# Altium PCB PCB.PcbDoc
Units mm, origin at the board's own origin, x right, y up, seen from the top; angles counter-clockwise.
Board outline 53.5 x 53 mm, 2 copper layers (Top Layer, Bottom Layer), stack 1.271 mm thick; 55 components, 41 nets, 214 pads, 205 vias.
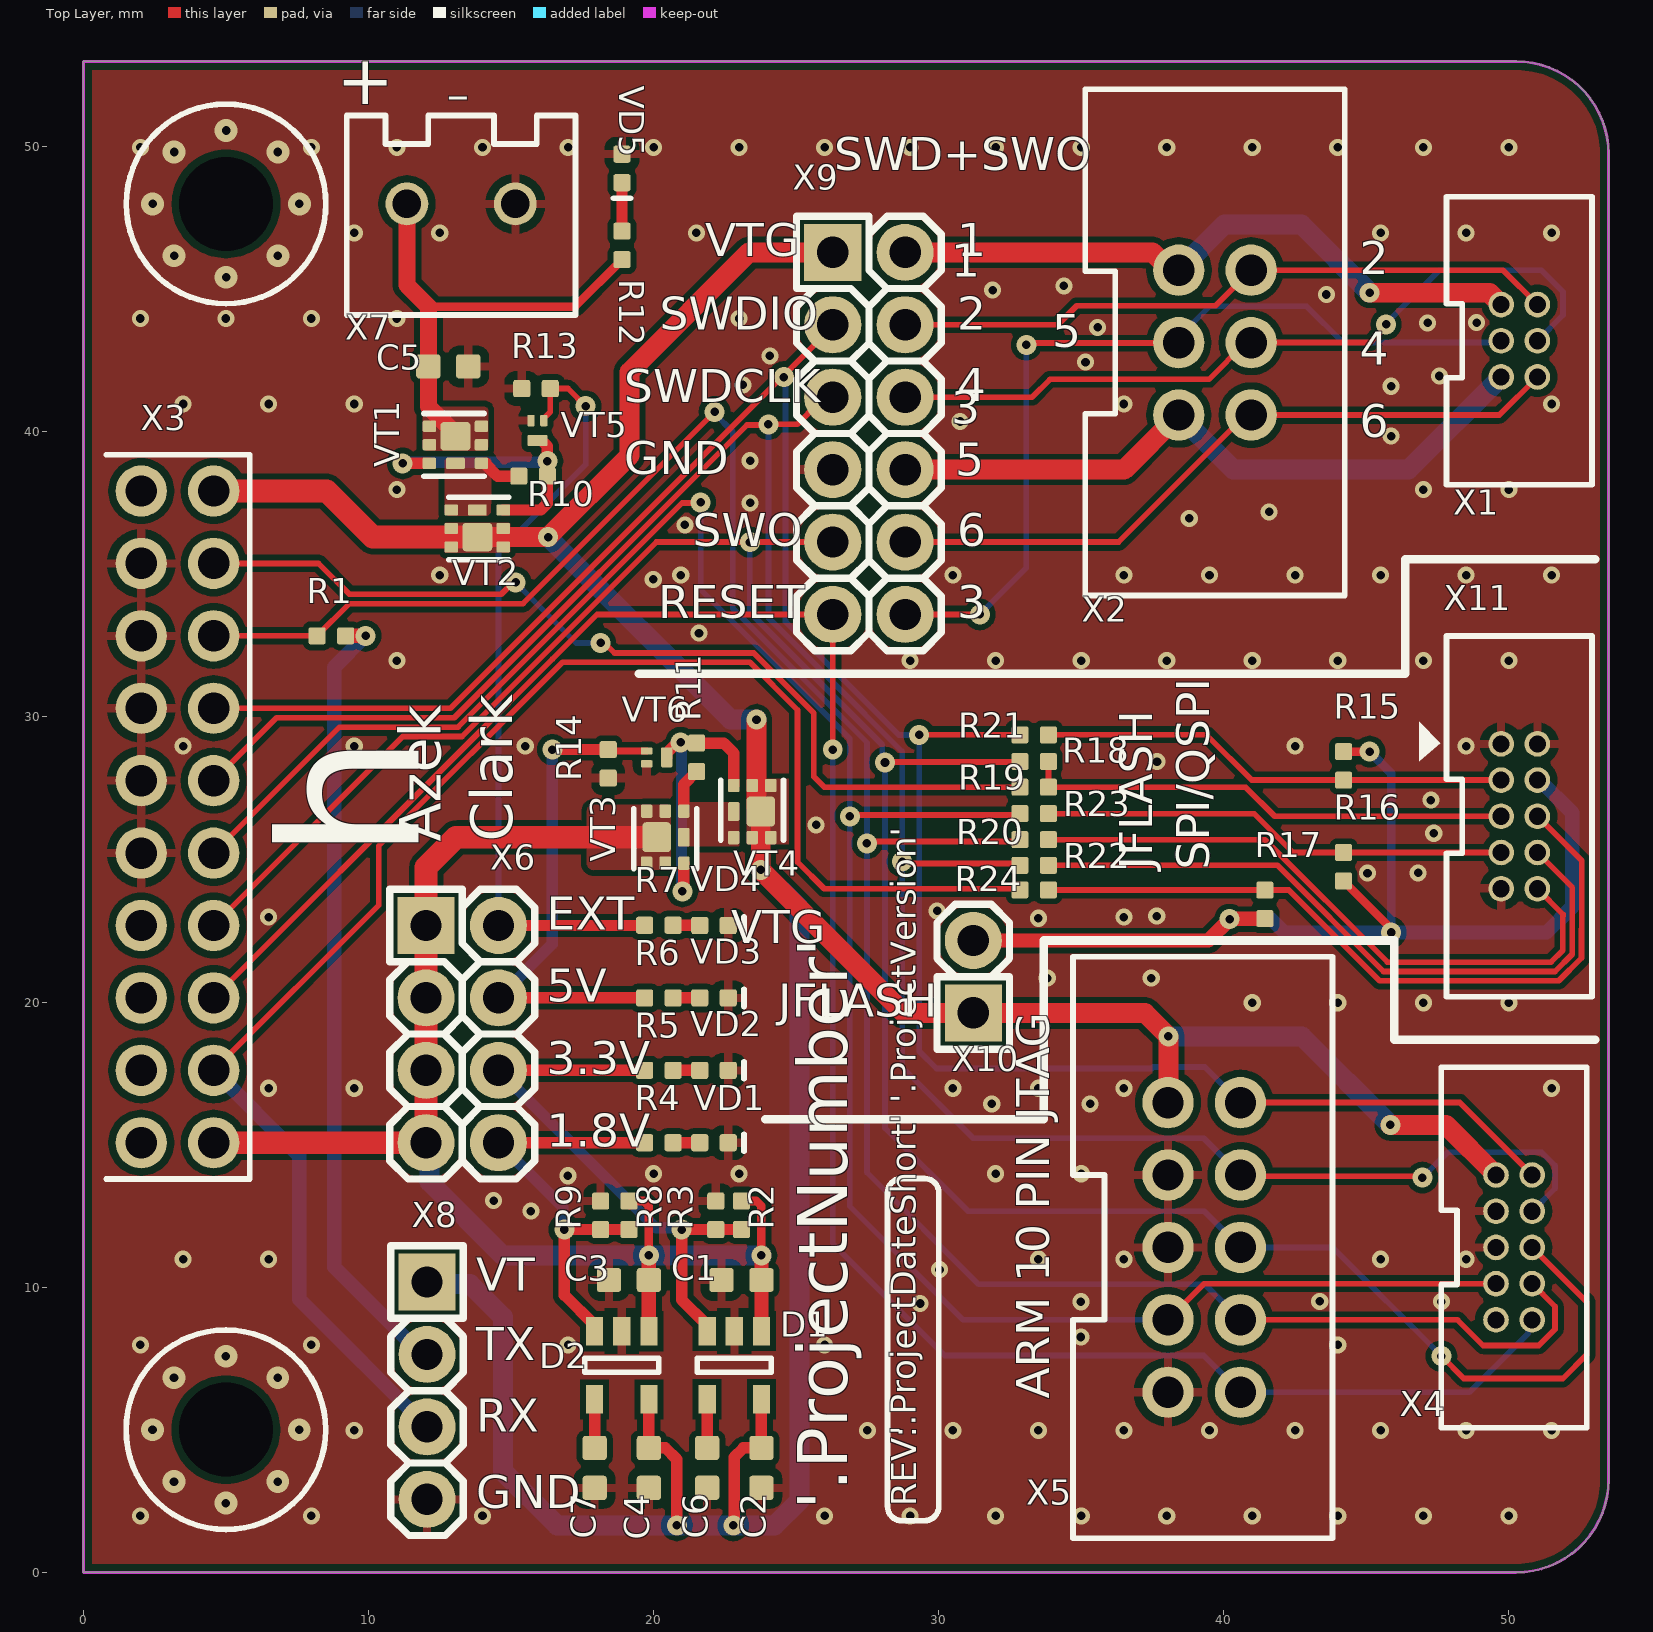
[diagram p0: Top Layer view]
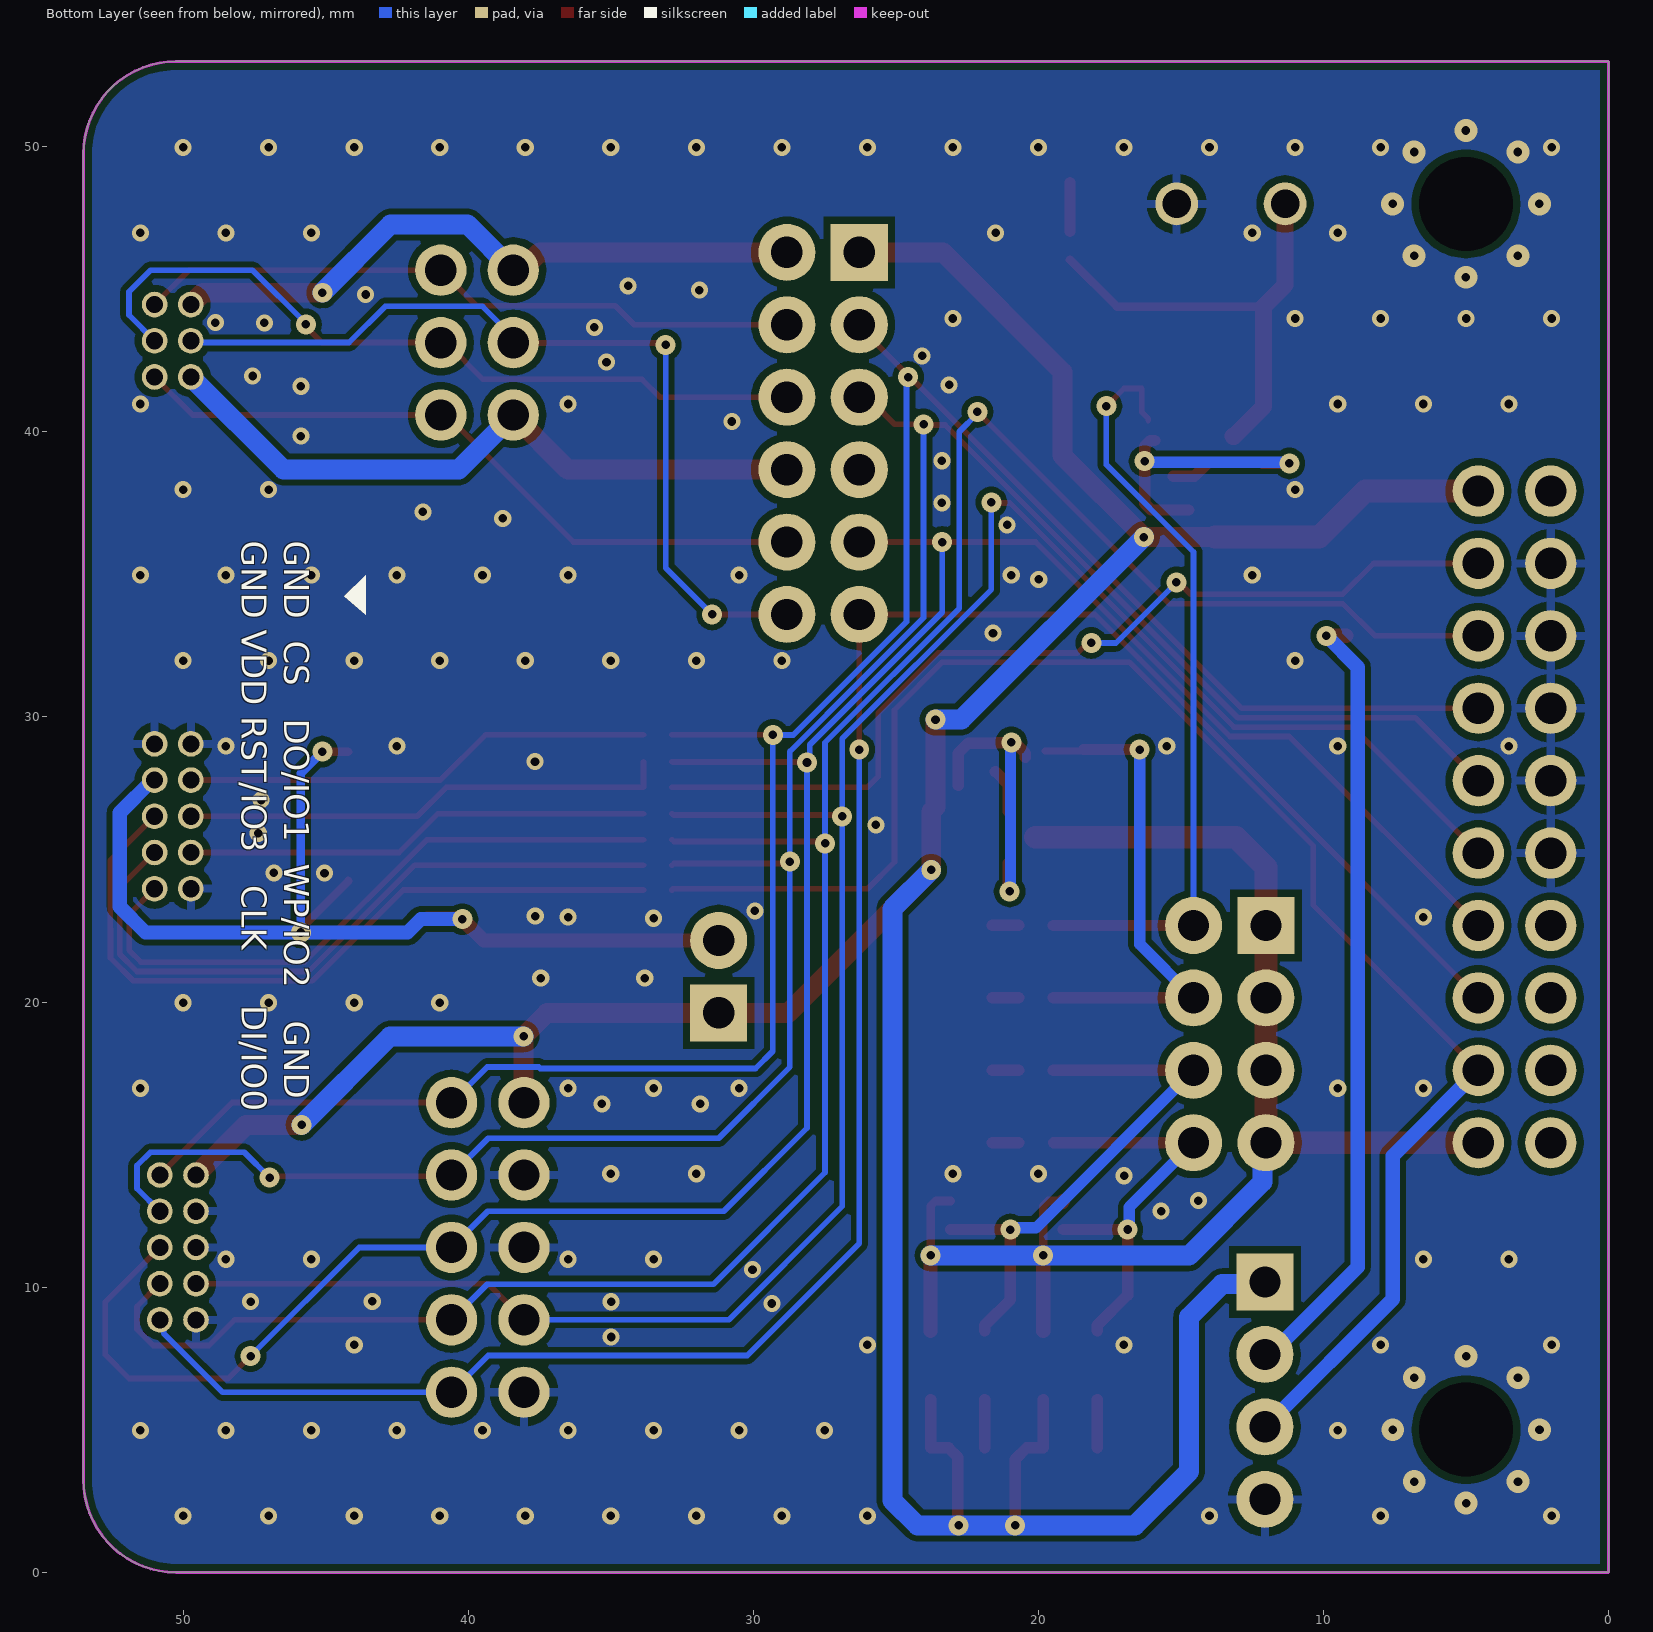
[diagram p1: Bottom Layer view, seen from below]
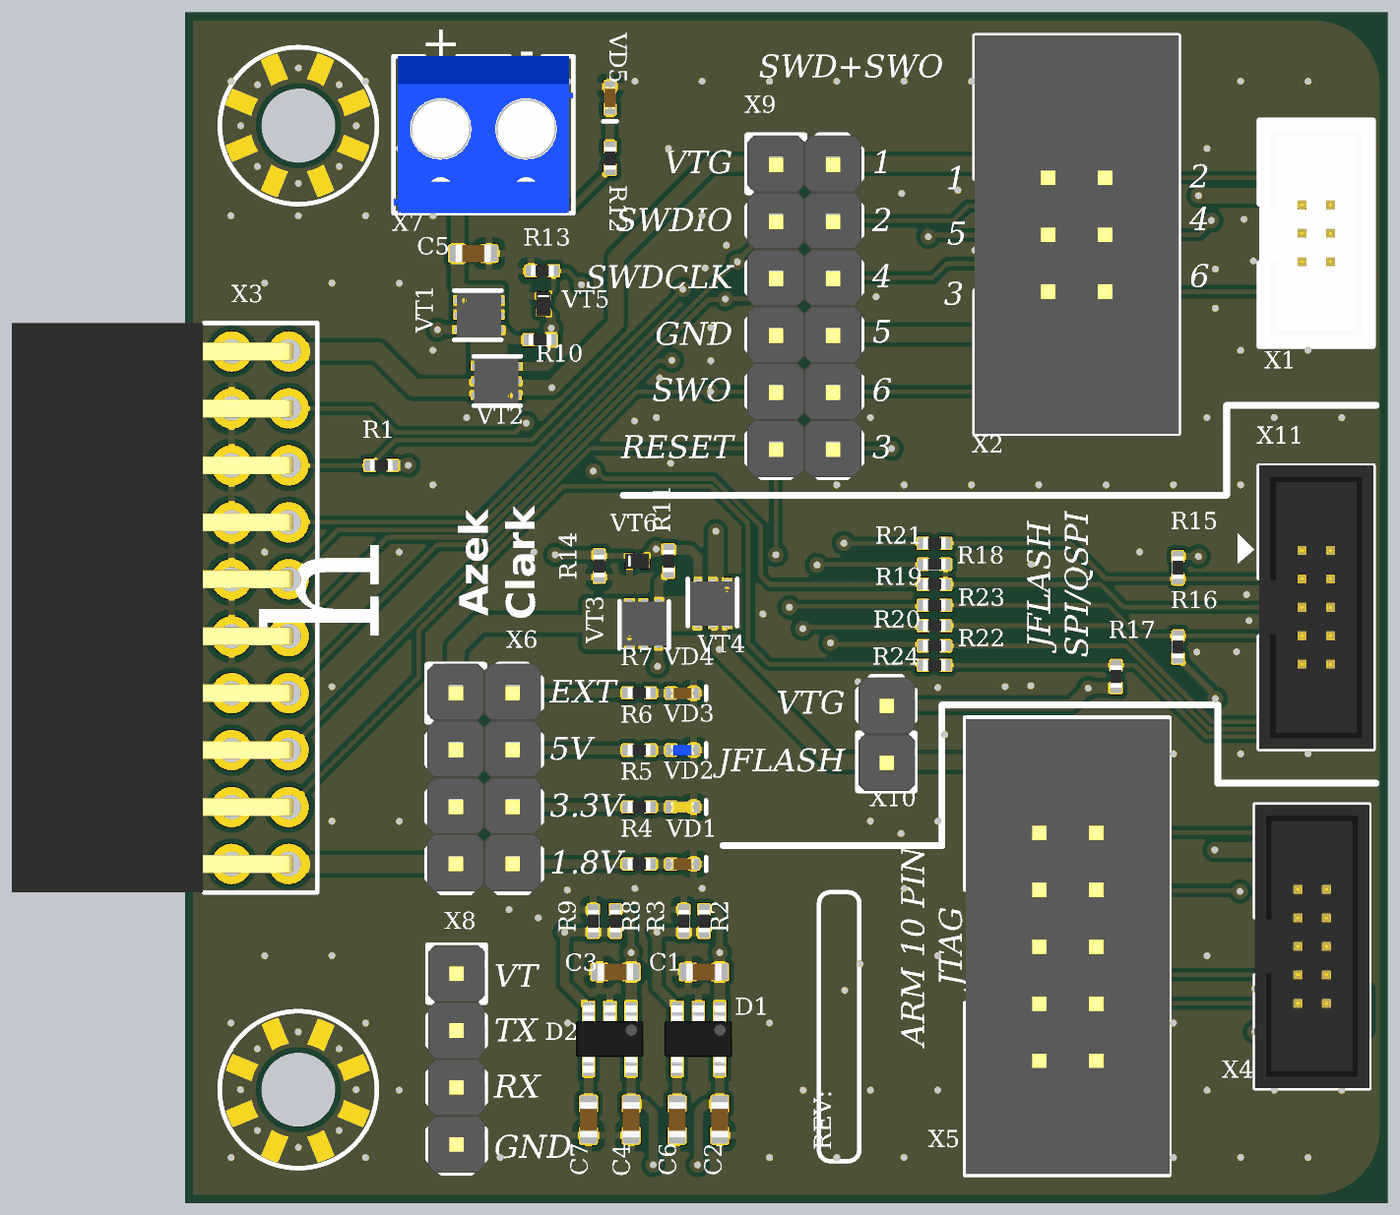
[diagram p2: 3D render of the assembled board from above, using the file's embedded part models]

## Layer stack, top to bottom
Top Solder: solder mask 0.0102, Solder Resist, Dk 3.5
Top Layer: signal copper 0.0356
Dielectric 1: dielectric 1.2, FR-4, Dk 4.8
Bottom Layer: signal copper 0.0356
Bottom Solder: solder mask 0.0102, Solder Resist, Dk 3.5

## Board outline
0,-0.005 0,52.995 50.25,52.995 cw(c50.25,49.745) 53.5,49.745 53.5,3.245 cw(c50.25,3.245) 50.25,-0.005

## Design rules (kind name [scope] priority, off if disabled: settings)
AcuteAngle [All] p1: minimum=4.50000000000000E+0001 checktracksonly=TRUE
BoardOutlineClearance [All] p1: gap=0.3 ignorepadtopadclearanceinfootprint=FALSE
Clearance Clearance_NPTH [All vs InPadClass('NPTH')] p1: gap=0.4 ignorepadtopadclearanceinfootprint=FALSE except(0: Arc-Hole Track-Hole SMDPad-Hole THPad-Hole Via-Hole Fill-Hole Poly-Hole Region-Hole Text-Hole)
Clearance Clearance_MultiLayerPad [OnLayer('Multi-Layer') and IsPad] p2: gap=0.25 ignorepadtopadclearanceinfootprint=FALSE except(0: Arc-Hole Track-Hole SMDPad-Hole THPad-Hole Via-Hole Fill-Hole Poly-Hole Region-Hole Text-Hole)
Clearance Clearance_Polygon [InPolygon] p3: gap=0.2 ignorepadtopadclearanceinfootprint=FALSE except(0: Arc-Hole Track-Hole SMDPad-Hole THPad-Hole Via-Hole Fill-Hole Poly-Hole Region-Hole Text-Hole)
Clearance [All] p4: gap=0.15 ignorepadtopadclearanceinfootprint=FALSE except(0: Arc-Hole Track-Hole SMDPad-Hole THPad-Hole Via-Hole Fill-Hole Poly-Hole Region-Hole Text-Hole; 0.127: Arc-Arc Arc-Track Track-Track)
ComponentClearance [All] p1: gap=0.2 collisioncheckmode=3 verticalgap=0.2 showdistances=FALSE
DiffPairsRouting [All] p1: maxlimit=0.254 minlimit=0.2 mostfreqgap=0.254 toplayer_minwidth=0.2 toplayer_maxwidth=0.5 toplayer_prefwidth=0.3 bottomlayer_minwidth=0.2 bottomlayer_maxwidth=0.5 bottomlayer_prefwidth=0.3 maxuncoupledlength=12.7
Height [All] p1: minheight=0 maxheight=60 prefheight=12.7
HoleSize [All] p1: absolutevalues=TRUE maxlimit=6.3 minlimit=0.3 maxpercent=80.000 minpercent=20.000
HoleToHoleClearance [All] p1: gap=0.2 allowstackedmicrovias=TRUE
MinimumAnnularRing [All] p1: minimumring=0.13
MinimumSolderMaskSliver [All] p1: minsoldermaskwidth=0.05
PasteMaskExpansion [All] p1: expansion=-0.05
PlaneClearance [All] p1: clearance=0.5
PlaneConnect [All] p1: planeconnectstyle=Relief reliefexpansion=0.5 reliefentries=4 reliefconductorwidth=0.3 reliefairgap=0.2
PolygonConnect PolygonConnect_Via [IsVia] p1: connectstyle=Direct reliefconductorwidth=0.254 reliefentries=4 polygonreliefangle="90 Angle" airgapwidth=0.254
PolygonConnect [All] p2: connectstyle=Relief reliefconductorwidth=0.3 reliefentries=4 polygonreliefangle="90 Angle" airgapwidth=0.3
RoomDefinition J-Flash [InComponentClass('J-Flash')] p1: confinementstyle=ConfineIn formatcopy=TRUE lockcomponents=FALSE outline 29.617,18.021 29.617,23.755 32.3,23.755 32.3,29.921 47.515,29.921 47.515,33.14 53.215,33.14 53.215,19.89 32.811,19.89 32.811,18.021
RoomDefinition VDD-SWITCH [InComponentClass('VDD-SWITCH')] p2: confinementstyle=ConfineIn formatcopy=TRUE lockcomponents=FALSE outline 23.524,23.339 23.524,14.411 16.211,14.411 16.211,13.414 10.369,13.414 10.369,24.336 16.211,24.336 16.211,23.339
RoomDefinition VDD-EXT-SWITCH [InComponentClass('VDD-EXT-SWITCH')] p3: confinementstyle=ConfineIn formatcopy=TRUE lockcomponents=FALSE outline 14.772,42.124 16.98,42.124 16.98,40.916 16.879,40.916 16.879,37.841 15.272,37.841 15.272,35.156 12.366,35.156 12.366,38.091 11.714,38.091 11.714,40.999 14.772,40.999
RoomDefinition VDD-EXT-CONNECTOR [InComponentClass('VDD-EXT-CONNECTOR')] p4: confinementstyle=ConfineIn formatcopy=TRUE lockcomponents=FALSE outline 8.94,43.795 8.94,51.395 17.56,51.395 17.56,50.289 19.493,50.289 19.493,47.889 19.443,47.889 19.443,45.489 17.56,45.489 17.56,43.795 14.175,43.795 14.175,41.62 11.425,41.62 11.425,43.795
RoomDefinition VDD-5V-SWITCH [InComponentClass('VDD-5V-SWITCH')] p5: confinementstyle=ConfineIn formatcopy=TRUE lockcomponents=FALSE outline 17.374,24.325 25.225,24.325 25.225,29.7 17.374,29.7
RoomDefinition LDO-3V3 [InComponentClass('LDO-3V3')] p6: confinementstyle=ConfineIn formatcopy=TRUE lockcomponents=FALSE outline 21.578,13.625 22.786,13.625 23.686,13.625 23.686,10.98 24.511,10.98 24.511,9.365 24.636,9.365 24.636,5.157 24.511,5.157 24.511,2.231 23.053,2.231 23.053,2.232 21.153,2.232 21.153,5.157 21.028,5.157 21.028,9.365 21.578,9.365
RoomDefinition LDO-1V8 [InComponentClass('LDO-1V8')] p7: confinementstyle=ConfineIn formatcopy=TRUE lockcomponents=FALSE outline 17.541,13.625 18.749,13.625 19.739,13.625 19.739,10.979 20.564,10.979 20.564,9.364 20.689,9.364 20.689,5.156 20.564,5.156 20.564,2.231 18.664,2.231 17.206,2.231 17.206,5.156 17.08,5.156 17.08,9.364 17.541,9.364
RoomDefinition JLINK-CONNECTOR [InComponentClass('JLINK-CONNECTOR')] p8: confinementstyle=ConfineIn formatcopy=TRUE lockcomponents=FALSE outline -8.064,13.441 -8.064,39.549 6.194,39.549 6.194,33.449 9.804,33.449 9.804,32.241 6.194,32.241 6.194,13.441
RoutingVias [All] p1: holewidth=0.3 width=0.7 viastyle="Through Hole" minholewidth=0.3 minwidth=0.6 maxholewidth=0.5 maxwidth=1.2
SilkToSilkClearance [All] p1: silktosilkclearance=0
SilkToSolderMaskClearance [IsPad] p1: minsilkscreentomaskgap=0.05 clearancetoexposedcopper=TRUE
SolderMaskExpansion SolderMaskExpansion_VIa [isVia] p1: expansion=0.102 istentingtop=TRUE
SolderMaskExpansion [All] p2: expansion=0.05 istentingtop=FALSE
UnRoutedNet [All] p1: checkbadconnections=TRUE
Width [All] p1: maxlimit=10 minlimit=0.127 preferedwidth=0.2
18 further rules are at their usual default settings.

## Classes and differential pairs
component class J-Flash: R15 R16 R17 R18 R19 R20 R21 R22 R23 R24 X10 X11
component class VDD-SWITCH: R4 R5 R6 R7 VD1 VD2 VD3 VD4 X6
component class VDD-EXT-SWITCH: R10 R13 VT1 VT2 VT5
component class VDD-EXT-CONNECTOR: C5 R12 VD5 X7
component class VDD-5V-SWITCH: R11 R14 VT3 VT4 VT6
component class LDO-3V3: C1 C2 C6 D1 R2 R3
component class LDO-1V8: C3 C4 C7 D2 R8 R9
component class JLINK-CONNECTOR: R1 X3

## Components (designator, comment, footprint, x,y, rotation, side; value= is the part's Value field where it differs from the comment)
C1 "1µF" CH0603CM 23.082,10.251 r0 top
C2 "1µF" CH0603CM 23.782,3.66 r90 top
C3 "1µF" CH0603CM 19.135,10.25 r0 top
C4 "1µF" CH0603CM 19.835,3.66 r90 top
C5 "1µF" CH0603CM 12.8,42.295 r180 top
C6 "10nF" CH0603CM 21.882,3.661 r90 top
C7 "10nF" CH0603CM 17.935,3.66 r90 top
D1 "LP2985-33DBVR" SOT23-5 22.832,7.261 r270 top
D2 "LP2985-18DBVR" SOT23-5 18.885,7.26 r270 top
R1 "0" CH0402R 8.7,32.845 r0 top
R2 "10k" CH0402R 23.082,12.521 r90 top
R3 "10k" CH0402R 22.182,12.521 r270 top
R4 "270" CH0402R 20.188,15.065 r180 top
R5 "270" CH0402R 20.188,17.605 r180 top
R6 "270" CH0402R 20.188,20.145 r180 top
R7 "270" CH0402R 20.188,22.694 r180 top
R8 "10k" CH0402R 19.135,12.521 r90 top
R9 "10k" CH0402R 18.145,12.521 r270 top
R10 "10k" CH0402R 15.775,38.445 r180 top
R11 "10k" CH0402R 21.51,28.582 r270 top
R12 "1k" CH0402R 18.893,46.539 r270 top
R13 "10k" CH0402R 15.876,41.52 r0 top
R14 "10k" CH0402R 18.41,28.357 r90 top
R15 "10k" CH0402R 44.203,28.282 r90 top
R16 "10k" CH0402R 44.203,24.745 r270 top
R17 "10k" CH0402R 41.442,23.428 r270 top
R18 "0" CH0402R 33.35,28.434 r0 top
R19 "0" CH0402R 33.35,27.537 r0 top
R20 "0" CH0402R 33.35,25.695 r0 top
R21 "0" CH0402R 33.35,29.371 r0 top
R22 "0" CH0402R 33.35,24.795 r0 top
R23 "0" CH0402R 33.35,26.609 r0 top
R24 "0" CH0402R 33.35,23.932 r0 top
VD1 "RED" CH0402LR 22.12,15.065 r180 top
VD2 "GREEN" CH0402LG 22.12,17.605 r180 top
VD3 "BLUE" CH0402LB 22.12,20.145 r180 top
VD4 "RED" CH0402LR 22.12,22.685 r180 top
VD5 "RED" CH0402LR 18.893,49.239 r90 top
VT1 "FDMA291P" "MicroFET 2x2" 13.05,39.545 r270 top
VT2 "FDMA291P" "MicroFET 2x2" 13.818,36.61 r90 top
VT3 "FDMA291P" "MicroFET 2x2" 20.41,25.782 r0 top
VT4 "FDMA291P" "MicroFET 2x2" 23.46,26.682 r180 top
VT5 "*" DFN1006-3L 15.925,40.045 r270 top
VT6 "*" DFN1006-3L 20.11,28.582 r0 top
X1 "IDC1.27-6" "CON: IDC1.27-6" 50.365,43.195 r90 top
X2 "IDC-6" "CON: IDC-6MS" 39.691,43.131 r90 top
X3 "PBD-20R" "CON: PBD-20R" 3.3,26.495 r90 top
X4 "IDC1.27-10" "CON: IDC1.27-10" 50.183,11.393 r90 top
X5 "IDC-10" "CON: IDC-10MS" 39.315,11.393 r90 top
X6 "PLD-8" "CON: PLD-8" 13.29,18.875 r270 top
X7 "340-3.81-02P" "CON: 340-3.81-02P" 13.25,47.595 r0 top
X8 "PLS-4" "CON: PLS-4" 12.055,6.368 r270 top
X9 "PLD-12" "CON: PLD-12" 27.555,39.945 r270 top
X10 "PLS-2" "CON: PLS-2" 31.214,20.888 r90 top
X11 "IDC1.27-10" "CON: IDC1.27-10" 50.365,26.515 r90 top

## Footprints (in the part's own frame and the unit in brackets; to place one, negate y for a bottom-side part, rotate by r counter-clockwise, add the part's x,y. Pads: shape width x height; smd on the part's side, far side on the other; paste and mask are expansions set on the pad)
CH0402LB [mm]
  rrect25% 0.6x0.6 smd: 1(0.5,0) 2(-0.5,0)
  silkscreen extent -1.05,-0.3 -1.05,0.3, body extent -0.5,-0.25 0.51,0.25, height 0.4
CH0402LG [mm]
  rrect25% 0.6x0.6 smd: 1(0.5,0) 2(-0.5,0)
  silkscreen extent -1.05,-0.3 -1.05,0.3, body extent -0.5,-0.25 0.5,0.25, height 0.4
CH0402LR [mm]
  rrect25% 0.6x0.6 smd: 1(0.5,0) 2(-0.5,0)
  silkscreen extent -1.05,-0.3 -1.05,0.3, body extent -0.51,-0.25 0.5,0.25, height 0.4
CH0402R [mm]
  rrect25% 0.6x0.6 smd: 1(-0.5,0) 2(0.5,0)
  body extent -0.5,-0.25 0.5,0.26, height 0.33
CH0603CM [mm] "Chip Capacitor, 2-Leads, Body 1,53x0,85mm, IPC Medium Density"
  rrect25% 0.85x0.85 smd: 1(-0.7,0) 2(0.7,0)
  body extent -0.8,-0.4 0.8,0.4, height 0.6
"CON: 340-3.81-02P" [mm] "2 pin 3.81mm screw connector"
  round 1.5 hole 1: 1(-1.901,0.4) 2(1.901,0.4)
  silkscreen extent -4.01,-3.5 4.01,3.5, body extent -4.01,-3.5 4.01,3.5, height 8.4
"CON: IDC1.27-6" [mm] "IDC1.27-6, 1.27mm pitch, 6 pin PCB-mount connector"
  round 0.9 hole 0.6: 1(1.27,0.635) 2(1.27,-0.635) 3(0,0.635) 4(0,-0.635) 5(-1.27,0.635) 6(-1.27,-0.635)
  silkscreen extent -5.05,-2.55 5.05,2.55, body extent -5.05,-2.55 5.05,2.55, height 5.4
"CON: IDC1.27-10" [mm] "IDC1.27-10, 1.27mm pitch, 10 pin PCB-mount connector"
  round 0.9 hole 0.6: 1(2.54,0.635) 2(2.54,-0.635) 3(1.27,0.635) 4(1.27,-0.635) 5(0,0.635) 6(0,-0.635) 7(-1.27,0.635) 8(-1.27,-0.635) 9(-2.54,0.635) 10(-2.54,-0.635)
  silkscreen extent -6.32,-2.55 6.32,2.55, body extent -6.32,-2.55 6.32,2.55, height 5.4
"CON: IDC-6MS" [mm] "IDC-6MS 6 pin PCB-mount connector"
  round 1.8 hole 1.1: 1(2.54,1.27) 2(2.54,-1.27) 3(0,1.27) 4(0,-1.27) 5(-2.54,1.27) 6(-2.54,-1.27)
  silkscreen extent -8.87,-4.55 8.89,4.55, body extent -8.87,-4.55 8.89,4.55, height 9
"CON: IDC-10MS" [mm] "IDC-10MS 10 pin PCB-mount header"
  round 1.8 hole 1.1: 1(5.08,1.27) 2(5.08,-1.27) 3(2.54,1.27) 4(2.54,-1.27) 5(0,1.27) 6(0,-1.27) 7(-2.54,1.27) 8(-2.54,-1.27) 9(-5.08,1.27) 10(-5.08,-1.27)
  silkscreen extent -10.2,-4.5 10.2,4.6, body extent -10.16,-4.53 10.14,4.57, height 9
"CON: PBD-20R" [mm] "PBD-20R"
  round 1.8 hole 1.1: 1(11.43,-1.27) 2(11.43,1.27) 3(8.89,-1.27) 4(8.89,1.27) 5(6.35,-1.27) 6(6.35,1.27) 7(3.81,-1.27) 8(3.81,1.27) 9(1.27,-1.27) 10(1.27,1.27) 11(-1.27,-1.27) 12(-1.27,1.27) 13(-3.81,-1.27) 14(-3.81,1.27) 15(-6.35,-1.27) 16(-6.35,1.27) 17(-8.89,-1.27) 18(-8.89,1.27) 19(-11.43,-1.27) 20(-11.43,1.27)
  silkscreen extent -12.7,-2.54 12.7,2.49, body extent -12.7,-1.45 12.7,11.06, height 5
"CON: PLD-8" [mm] "PLD-40 8 pin header"
  rect 2x2 hole 1.1: 1(-3.81,-1.27)
  round 2 hole 1.1: 2(-3.81,1.27) 3(-1.27,-1.27) 4(-1.27,1.27) 5(1.27,-1.27) 6(1.27,1.27) 7(3.81,-1.27) 8(3.81,1.27)
  silkscreen extent -5.08,-2.54 5.08,2.54, body extent -5.13,-2.55 5.03,2.53, height 8.54
"CON: PLD-12" [mm]
  rect 2x2 hole 1.1: 1(-6.35,-1.27)
  round 2 hole 1.1: 2(-6.35,1.27) 3(-3.81,-1.27) 4(-3.81,1.27) 5(-1.27,-1.27) 6(-1.27,1.27) 7(1.27,-1.27) 8(1.27,1.27) 9(3.81,-1.27) 10(3.81,1.27) 11(6.35,-1.27) 12(6.35,1.27)
  silkscreen extent -7.62,-2.54 7.62,2.54, body extent -7.62,-2.54 7.62,2.54, height 8.54
"CON: PLS-2" [mm]
  rect 2x2 hole 1.1: 1(-1.27,0)
  round 2 hole 1.1: 2(1.27,0)
  silkscreen extent -2.54,-1.27 2.54,1.27, body extent -2.57,-1.28 2.51,1.26, height 8.54
"CON: PLS-4" [mm] "PLS-40 4 pin header"
  rect 2x2 hole 1.1: 1(-3.81,0)
  round 2 hole 1.1: 2(-1.27,0) 3(1.27,0) 4(3.81,0)
  silkscreen extent -5.08,-1.27 5.08,1.27, body extent -5.08,-1.27 5.08,1.27, height 8.54
DFN1006-3L [mm] "3-Leads, Body 1.0x0.6mm (max), Pitch 0,35mm"
  rrect25% 0.4x0.25 smd: 1(-0.35,0.225) 3(-0.35,-0.225)
  rrect25% 0.4x0.7 smd: 2(0.35,0)
  body extent -0.54,-0.34 0.54,0.34, height 0.54
"MicroFET 2x2" [mm] "MicroFET, 2.0x2.0x0.8 mm"
  rrect25% 0.4x0.47 smd: 1(-0.65,0.913) 1(-0.65,-0.913) 1(0,0.913) 1(0,-0.913) 2(0.65,0.913) 3(0.65,-0.913)
  rrect25% 1x1.05 smd: 1(-0.3,0)
  rrect25% 0.4x0.66 smd: 2(0.65,0)
  silkscreen extent -1.1,-1.1 1.1,1, body extent -1,-1 1,1, height 0.8
SOT23-5 [mm] "SOT23, 5-Leads, Body 2,90x2,80mm, Pitch 0,95mm, IPC Medium Density"
  rect 1x0.6 smd: 1(-1.2,0.95) 2(-1.2,0) 3(-1.2,-0.95) 4(1.2,-0.95) 5(1.2,0.95)
  round 0.5 on Mech1: ""(-1.1,1.1)
  silkscreen extent -0.25,-1.3 0.25,1.3, body extent -1.5,-1.5 1.5,1.5, height 1.3

## Part data
C1 C2 C3 C4 C5 C6 C7: library part Capacitor
  C1 C2 C6: ClassName=LDO-3V3
  C3 C4 C7: ClassName=LDO-1V8
  C5: ClassName=VDD-EXT-CONNECTOR
D1: "LDO", Manufacturer="Texas Instruments", ClassName=LDO-3V3, ComponentKind=SOT-23-5, HelpURL=https://www.digikey.com/product-detail/en/texas-instruments/LP2985-33DBVR/296-18476-1-ND/809911, Model=LP2985-33DBVR
D2: library part LP2985-33DBVR, "LDO", Manufacturer="Texas Instruments", ClassName=LDO-1V8, ComponentKind=SOT-23-5, HelpURL=https://www.digikey.com/product-detail/en/texas-instruments/LP2985-33DBVR/296-18476-1-ND/809911, Model=LP2985-18DBVR
R1 R2 R3 R4 R5 R6 R7 R8 R9 R10 R11 R12 R13 R14 R15 R16 R17 R18 R19 R20 R21 R22 R23 R24: library part Resistor
  R1: ClassName=JLINK-CONNECTOR
  R2 R3: ClassName=LDO-3V3
  R4 R5 R6 R7: ClassName=VDD-SWITCH
  R8 R9: ClassName=LDO-1V8
  R10 R13: ClassName=VDD-EXT-SWITCH
  R11 R14: ClassName=VDD-5V-SWITCH
  R12: ClassName=VDD-EXT-CONNECTOR
  R15 R16 R17 R18 R19 R20 R21 R22 R23 R24: ClassName=J-FLASH
VD1 VD2 VD3 VD4 VD5: library part LED
  VD1 VD2 VD3 VD4: ClassName=VDD-SWITCH
  VD5: ClassName=VDD-EXT-CONNECTOR
VT1 VT2 VT3 VT4: library part P-chanel, "Mosfet", Model=FDMA291P
  VT1 VT2: ClassName=VDD-EXT-SWITCH
  VT3 VT4: ClassName=VDD-5V-SWITCH
VT5 VT6: library part N-chanel, "Mosfet"
  VT5: ClassName=VDD-EXT-SWITCH
  VT6: ClassName=VDD-5V-SWITCH
X1 X2: library part 6-Connector
  X1: Model=IDC1.27-6
  X2: Model=IDC-6
X3: library part 20-Connector, ClassName=JLINK-CONNECTOR, Model=PBD-20R
X4 X5 X11: library part 10-Connector
  X4: Model=IDC1.27-10
  X5: Model=IDC-10
  X11: ClassName=J-FLASH, Model=IDC1.27-10
X6: library part 8-Connector, ClassName=VDD-SWITCH, Model=PLD-8
X7 X10: library part 2-Connector
  X7: ClassName=VDD-EXT-CONNECTOR, Model=340-3.81-02P
  X10: ClassName=J-FLASH, Model=PLS-2
X8: library part 4-Connector, Model=PLS-4
X9: library part 12-Connector, Model=PLD-12

## Free pads (board coordinates)
  round 0 hole 3.3 unplated paste+0 mask+0.1: 0(5,5) 0(5.005,47.995)

## Via types
v1: diameter 0.6, hole 0.3, Top Layer to Bottom Layer, tented both sides, 149 vias
v2: diameter 0.7, hole 0.3, Top Layer to Bottom Layer, tented both sides, 40 vias
v3: diameter 0.8, hole 0.3, Top Layer to Bottom Layer, tented both sides, 16 vias

## Nets (pads, with @x,y where several pads share a name; then routed paths per layer and width w, separated by ;. In a path a pad name is that pad's centre, name@x,y a point inside that pad or via, vN(x,y) a via of type N, cw(c..) or ccw(c..) an arc to the next point about the centre after c; other vN are vias at no path point)
EXT-RESET: X1.3 X2.3 X9.12 | length 30.7
  Top Layer w0.2: X9.12 v2(31.442,33.595) ; v2(33.075,43.048) 33.14,43.113 38.404,43.113 X2.3
  Bottom Layer w0.2: v2(31.442,33.595) 33.075,35.228 v2(33.075,43.048) ; X2.3@38.227,43.131 39.497,44.401 42.912,44.401 44.182,43.131 49.665,43.131 X1.3
EXT-SWDCLK/TCLK: X1.4 X2.4 X9.6 | length 27.4
  Top Layer w0.2: X9.6 33.277,41.215 33.902,41.841 39.477,41.841 40.767,43.131 45.137,43.131 45.692,43.686 v2(45.692,43.767)
  Bottom Layer w0.2: v2(45.692,43.767) 45.692,43.799 47.564,45.671 51.145,45.671 51.9,44.915 51.9,44.095 X1.4
EXT-SWDIO/TMS: X1.2 X2.2 X9.4 | length 23.5
  Top Layer w0.2: X9.4 34.179,43.755 34.844,44.421 39.711,44.421 X2.2 49.795,45.671 X1.2
EXT-SWO/TDO: X1.6 X2.6 X9.10 | length 24.6
  Top Layer w0.2: X9.10 36.312,36.135 40.767,40.591 X2.6 49.665,40.591 X1.6
GND: C1.1 C2.1 C3.1 C4.1 C5.1 C6.1 C7.1 D1.2 D2.2 R3.1 R9.1 R13.1 R14.1 VD1.2 VD2.2 VD3.2 VD4.2 VD5.1 VT5.3 VT6.3 X3.4 X3.6 X3.8 X3.10 X3.12 X4.3 X4.5 X4.9 X5.3 X5.5 X5.9 X7.2 X8.4 X9.7 X11.1 X11.2 X11.9
  other v1: 2,1.977 8,1.977 14,1.977 26,1.977 29,1.977 32,1.977 35,1.977 38,1.977 41,1.977 44,1.977 47,1.977 50,1.977 9.5,4.977 27.5,4.977 30.5,4.977 33.5,4.977 36.5,4.977 39.5,4.977 42.5,4.977 45.5,4.977 48.5,4.977 51.5,4.977 2,7.977 8,7.977 17,7.977 26,7.977 44,7.977 34.992,8.252 29.35,9.426 34.992,9.49 43.368,9.5 47.633,9.493 30.03,10.617 3.5,10.977 6.5,10.977 33.5,10.977 36.5,10.977 45.5,10.977 48.5,10.977 15.696,12.665 14.392,13.033 16.992,13.907 20,13.977 23,13.977 32,13.977 35,13.977 31.86,16.429 35.31,16.428 6.5,16.977 9.5,16.977 30.5,16.977 33.5,16.977 36.5,16.977 51.5,16.977 41,19.977 44,19.977 47,19.977 50,19.977 33.809,20.84 37.459,20.84 33.5,22.937 6.5,22.977 36.5,22.977 37.65,23.017 29.944,23.198 45.042,24.524 46.816,24.532 47.367,25.92 25.703,26.215 47.266,27.082 37.659,28.432 3.5,28.977 9.5,28.977 15.5,28.977 42.5,28.977 48.5,28.977 11,31.977 29,31.977 32,31.977 35,31.977 38,31.977 41,31.977 44,31.977 47,31.977 50,31.977 21.594,32.941 19.988,34.823 12.5,34.977 20.954,34.977 30.5,34.977 36.5,34.977 39.5,34.977 42.5,34.977 45.5,34.977 48.5,34.977 51.5,34.977 21.101,36.739 38.789,36.966 41.59,37.195 23.385,37.508 11,37.977 47,37.977 50,37.977 23.385,38.987 45.873,39.849 30.75,40.363 3.5,40.977 6.5,40.977 9.5,40.977 36.5,40.977 51.5,40.977 45.873,41.599 23.136,41.648 47.564,41.96 35.15,42.445 24.079,42.662 35.577,43.663 47.15,43.819 48.869,43.83 2,43.977 5,43.977 8,43.977 11,43.977 23,43.977 43.6,44.817 31.892,44.971 34.39,45.118 9.5,46.977 12.5,46.977 21.5,46.977 45.5,46.977 48.5,46.977 51.5,46.977 2,49.977 8,49.977 11,49.977 14,49.977 17,49.977 20,49.977 23,49.977 26,49.977 29,49.977 32,49.977 35,49.977 38,49.977 41,49.977 44,49.977 47,49.977 50,49.977
  other v3: 5,2.425 3.179,3.179 6.821,3.179 2.425,5 7.575,5 3.179,6.821 6.821,6.821 5,7.575 5.005,45.42 3.184,46.174 6.826,46.174 2.43,47.995 7.58,47.995 3.184,49.816 6.826,49.816 5.005,50.57
GND-EXT: X1.5 X2.5 X9.8 | length 23.8
  Top Layer w0.7: X9.8 36.505,38.675 X2.5
  Bottom Layer w0.7: X2.5 40.333,38.678 46.483,38.678 X1.5
JLINK-RX: R24.1 X3.17 X8.3 | length 57.5
  Top Layer w0.2: X3.17 10.356,23.391 10.356,25.469 16.805,31.918 23.379,31.918 25.05,30.247 25.05,24.915 25.989,23.975 32.806,23.975 R24.1
  Bottom Layer w0.5: X3.17 7.575,14.6 7.575,9.578 X8.3
JLINK-TX: R1.2 X8.2 | length 27.8
  Top Layer w0.5: R1.2 v2(9.899,32.845)
  Bottom Layer w0.5: v2(9.899,32.845) 8.8,31.746 8.8,29.267 8.8,16.687 8.8,10.705 11.867,7.638 X8.2
NetC6_2: C6.2 D1.4 | length 1.7
  Top Layer w0.4: C6.2 D1.4
NetC7_2: C7.2 D2.4 | length 1.7
  Top Layer w0.4: C7.2 D2.4
NetR4_1: R4.1 VD1.1 | length 0.9
  Top Layer w0.4: R4.1 VD1.1
NetR5_1: R5.1 VD2.1 | length 0.9
  Top Layer w0.4: R5.1 VD2.1
NetR6_1: R6.1 VD3.1 | length 0.9
  Top Layer w0.4: R6.1 VD3.1
NetR7_1: R7.1 VD4.1 | length 0.9
  Top Layer w0.4: R7.1 20.693,22.69 21.616,22.69 VD4.1
NetR10_1: R10.1 VT1.3 VT2.3 VT5.2 | length 10.1
  Top Layer w0.4: v2(11.201,38.895) VT1.3 ; VT2.3 16.041,37.26 16.275,37.494 R10.1 v2(16.275,38.97) 16.275,39.495 16.075,39.695 VT5.2
  Bottom Layer w0.4: v2(11.201,38.895) 11.238,38.933 16.238,38.933 v2(16.275,38.97)
NetR10_2: R10.2 VT1.2 VT2.2 | length 1.4
  Top Layer w0.4: VT1.2@14.08,38.895 14.115,38.895 14.115,38.86 14.53,38.445 R10.2
NetR11_1: R11.1 VT3.3 VT4.3 VT6.2 | length 10.3
  Top Layer w0.4: VT6.2 20.46,28.732 20.782,29.054 20.892,29.054 v2(20.95,29.111) 20.964,29.097 21.495,29.097 R11.1 22.46,29.082 22.81,28.732 VT4.3 ; v2(21.01,23.882) 21.06,23.932 VT3.3
  Bottom Layer w0.4: v2(21.01,23.882) 20.98,23.912 20.98,29.081 v2(20.95,29.111) cw(c20.95,29.051) v2@21.01,29.051
NetR11_2: R11.2 VT3.2 VT4.2 | length 1.6
  Top Layer w0.4: VT3.2@21.06,26.694 21.06,27.632 R11.2
NetR12_1: R12.1 VD5.2 | length 1.7
  Top Layer w0.4: R12.1 VD5.2
nRESET/QSPI-IO3: R17.1 R24.2 X11.6 | length 26
  Top Layer w0.2: R24.2 40.63,23.932 42.281,23.932 45.467,20.746 51.751,20.746 52.548,21.543 52.548,22.554 52.554,22.56 52.554,24.961 X11.6
nWP/QSPI-IO2: R16.1 R23.2 X11.7 | length 16.4
  Top Layer w0.2: R23.2 41.065,26.609 42.428,25.245 X11.7
RESET: X3.15 X4.10 X5.10 X9.11 | length 77.3
  Top Layer w0.2: X3.15 13.414,28.989 16.456,32.031 18.02,33.595 X9.11 v2(26.285,28.857)
  Bottom Layer w0.2: v2(26.285,28.857) 26.285,11.53 30.211,7.603 39.295,7.603 X5.10 48.617,6.313 50.684,8.38 50.684,8.719 X4.10
RTCK: R23.1 X3.11 X4.7 X5.7 | length 80
  Top Layer w0.2: X3.11 8.988,29.643 13.143,29.643 21.001,37.501 21.626,37.501 v2(21.651,37.527) ; v2(26.885,26.515) 26.932,26.562 32.803,26.562 R23.1 ; X5.7 39.315,10.123 X4.7
  Bottom Layer w0.2: v2(21.651,37.527) 21.651,34.47 26.885,29.236 v2(26.885,26.515) ; v2@26.824,26.577 v2(26.885,26.515) ; X5.7 30.865,8.853 26.885,12.833 v2(26.885,26.515)
SPI-CLK: R22.2 X11.8 | length 24.2
  Top Layer w0.2: R22.2 41.88,24.795 45.603,21.073 51.615,21.073 52.221,21.679 52.221,22.786 52.227,22.791 52.227,24.018 X11.8
SPI-CS: R15.1 R21.2 X11.3 | length 16.5
  Top Layer w0.2: R21.2 39.395,29.371 40.981,27.785 43.6,27.785 X11.3
SPI-DI/QSPI-IO0: R20.2 X11.10 | length 22.5
  Top Layer w0.2: R20.2 41.442,25.695 45.738,21.4 51.48,21.4 51.894,21.814 51.894,23.011 51.9,23.017 51.9,23.075 X11.10
SPI-DO/QSPI-IO1: R18.2 R19.2 X11.5 | length 17.2
  Top Layer w0.2: R18.2 R19.2 40.767,27.537 41.788,26.515 X11.5
SWDCLK/TCLK: R22.1 X3.9 X4.4 X5.4 X9.5 | length 83.6
  Top Layer w0.2: X3.9 6.775,29.97 13.007,29.97 23.279,40.241 24.007,40.241 v2(24.029,40.263) 25.037,40.263 X9.5@25.759,40.985 ; v2(28.718,24.927) 28.784,24.861 32.784,24.861 R22.1 ; X5.4 40.63,13.888 46.923,13.888 v2(46.968,13.843) ; X9.5@25.759,40.985 26.055,40.985 X9.5 25.989,41.215 X9.5@25.759,40.985
  Bottom Layer w0.2: v2(24.029,40.263) 24.029,33.48 26.167,31.342 28.718,28.791 v2(28.718,24.927) ; v2@28.632,24.927 28.718,24.841 28.718,17.719 31.214,15.223 39.295,15.223 X5.4 ; v2(46.968,13.843) 47.858,14.733 51.15,14.733 51.618,14.265 51.618,13.463 X4.4
SWDIO/TMS: R21.1 X3.7 X4.2 X5.2 X9.3 | length 80.3
  Top Layer w0.2: X3.7 12.88,30.305 24.497,41.922 v2(24.568,41.922) 24.568,41.98 26.285,43.697 X9.3 ; v2(29.318,29.374) 29.319,29.372 32.849,29.372 R21.1 ; X5.2 48.278,16.473 X4.2
  Bottom Layer w0.2: v2(24.568,41.922) 24.629,41.861 24.629,33.342 28.601,29.37 v2@29.314,29.37 ; v2(29.318,29.374) v2@29.314,29.37 ; X5.2 39.335,17.723 37.528,17.723 37.47,17.666 29.926,17.666 29.318,18.274 29.318,29.367 v2@29.314,29.37
SWO/TDO: R18.1 X3.13 X4.6 X5.6 X9.9 | length 87.7
  Top Layer w0.2: X3.13 11.201,29.316 13.278,29.316 20.098,36.135 X9.9 ; v2(28.118,28.402) 28.134,28.418 32.834,28.418 R18.1 ; v2(47.633,7.581) 48.42,6.794 51.894,6.794 52.733,7.633 52.733,9.478 X4.6
  Bottom Layer w0.2: v2(23.375,36.135) 23.375,33.671 28.022,29.024 28.022,28.497 v2(28.118,28.402) 28.118,15.582 31.037,12.663 39.315,12.663 X5.6 43.821,11.393 v2(47.633,7.581)
TDI: R1.1 R20.1 X3.5 X4.8 X5.8 | length 84
  Top Layer w0.2: X3.5 R1.1 9.33,33.975 15.421,33.975 22.139,40.694 v2(22.139,40.702) ; v2(27.485,25.564) 27.551,25.63 32.784,25.63 R20.1 ; X5.8 48.198,8.853 49.098,7.953 51.05,7.953 51.618,8.522 51.618,9.323 X4.8
  Bottom Layer w0.2: v2(22.139,40.702) 22.139,40.639 22.775,40.004 22.775,33.809 27.485,29.099 v2(27.485,25.564) 27.485,14.018 31.4,10.103 39.335,10.103 X5.8
TRST: R19.1 X3.3 | length 33.2
  Top Layer w0.2: X3.3 8.247,35.385 9.33,34.302 14.659,34.302 15.077,34.72 v2(15.16,34.72) ; v2(18.145,32.595) 18.28,32.595 18.63,32.245 23.514,32.245 25.62,30.139 25.62,27.907 25.99,27.537 R19.1
  Bottom Layer w0.2: v2(15.16,34.72) 17.285,32.595 v2(18.145,32.595)
VDD-1V8-EN: D2.3 R4.2 R8.1 R9.2 X6.8 | length 15.2
  Top Layer w0.4: X6.8 R4.2@19.46,15.065 ; v2(16.874,12.021) R9.2 R8.1 ; v2(16.874,12.021) 16.874,9.721 17.935,8.66 D2.3
  Bottom Layer w0.4: X6.8 16.817,12.809 16.817,12.079 v2(16.874,12.021)
VDD-3V3-EN: D1.3 R2.1 R3.2 R5.2 X6.6 | length 19.7
  Top Layer w0.4: X6.6 R5.2@19.488,17.605 ; D1.3 21.882,8.661 20.985,9.558 v2(20.985,12.021) R3.2 R2.1
  Bottom Layer w0.4: X6.6 20.087,12.078 20.928,12.078 v2(20.985,12.021)
VDD-5V-EN: R6.2 R14.2 VT6.1 X6.4 | length 17.8
  Top Layer w0.25: R14.2 ccw(c18.46,28.857) 18.46,28.807 VT6.1
  Top Layer w0.4: X6.4 R6.2@19.488,20.145 ; v2(16.449,28.857) R14.2
  Bottom Layer w0.4: X6.4 16.449,22.034 v2(16.449,28.857)
VDD-EXT: C5.2 R12.2 VT1.1 X7.1 | length 16.4
  Top Layer w0.3: 12.1,44.395 17.25,44.395 R12.2
  Top Layer w0.6: X7.1 11.349,45.146 12.1,44.395 C5.2 12.1,40.888 13.143,39.845 VT1.1@13.168,39.845
VDD-EXT-EN: R7.2 R13.2 VT5.1 X6.2 | length 27.1
  Top Layer w0.2: VT5.1 16.15,40.47 16.376,40.696 R13.2 16.997,41.52 v2(17.618,40.899)
  Top Layer w0.4: X6.2 R7.2@19.488,22.685
  Bottom Layer w0.2: X6.2 14.56,35.786 17.618,38.844 v2(17.618,40.899)
  Bottom Layer w0.4: X6.2 X6.2@14.569,22.694
VDD-IN: C1.2 C3.2 D1.1 D2.1 R2.2 R8.2 VT3.1 X3.19 X6.1 X6.3 X6.5 X6.7 | length 50.2
  Top Layer w0.3: R8.2 19.659,13.021 19.835,12.845 v2(19.835,11.114) ; R2.2 23.606,13.021 23.782,12.846 v2(23.782,11.114)
  Top Layer w0.5: R8.2 R8.2@19.185,12.971 ; D2.1 C3.2 v2(19.835,11.114) ; D1.1 C1.2 v2(23.782,11.114)
  Top Layer w0.8: X3.19 X6.7 X6.5 X6.3 X6.1 12.02,24.731 13.071,25.782 VT3.1@20.11,25.782
  Bottom Layer w0.7: X6.7 12.141,14.944 12.141,13.687 14.714,11.114 v2(19.835,11.114) v2(23.782,11.114)
VDD-SPI: R15.2 R16.2 R17.2 X10.2 X11.4 | length 38.2
  Top Layer w0.3: R16.2 45.796,22.653 45.796,22.517 v2(45.873,22.44) ; R15.2 v2(45.119,28.782)
  Top Layer w0.5: X10.2 39.459,22.158 v2(40.207,22.907) ; v2@40.229,22.928 40.239,22.917 41.431,22.917 R17.2
  Bottom Layer w0.3: v2(45.119,28.782) 45.873,28.028 v2(45.873,22.44)
  Bottom Layer w0.5: v2(40.207,22.907) 40.21,22.91 41.657,22.91 42.127,22.44 v2(45.873,22.44) 51.318,22.44 52.221,23.343 52.221,26.638 51.074,27.785 X11.4
VDD-TARGET: C2.2 C4.2 D1.5 D2.5 VT2.1 VT4.1 X3.1 X4.1 X5.1 X8.1 X9.1 X10.1 | length 129.2
  Top Layer w0.4: C4.2 D2.5 ; C4.2 20.417,4.361 20.817,3.961 v2(20.817,1.645) ; v2@22.832,1.675 22.832,4.039 23.153,4.36 23.782,4.36 D1.5
  Top Layer w0.7: VT2.1@13.818,36.31 v2(16.3,36.31) 19.154,39.164 19.154,42.099 23.35,46.295 X9.1 ; v2(23.61,29.907) 23.61,26.832 23.76,26.682 v2(23.76,24.635) 28.777,19.618 37.235,19.618 v2(38.06,18.793) 38.06,16.488 X5.1 ; v2(45.843,15.693) 47.788,15.693 X4.1
  Top Layer w0.8: X3.1 8.534,37.925 10.149,36.31 VT2.1@13.818,36.31
  Bottom Layer w0.7: X8.1@12.01,10.103 13.56,10.103 14.714,8.949 14.714,3.541 16.61,1.645 v2(20.817,1.645) 20.821,1.641 v2(22.798,1.641) 24.246,1.641 25.125,2.52 25.125,23.27 v2(23.76,24.635) ; v2(16.3,36.31) 22.703,29.907 v2(23.61,29.907) ; v2(38.06,18.793) 42.743,18.793 v2(45.843,15.693)
VDD-TARGET-EXT: X1.1 X2.1 X9.2 | length 23
  Top Layer w0.7: X9.2 37.499,46.295 38.123,45.671 X2.1 ; v2(45.119,44.879) 49.316,44.879 X1.1
  Bottom Layer w0.7: X2.1 40.02,47.27 42.727,47.27 v2(45.119,44.879)
pads on no net: D1. D2. X3.2 X3.14 X3.16 X3.18 X3.20

## Polygon pours and split planes (outlines as drawn)
GND on Top Layer "GND_L01_P009" (solid, remove dead copper, pour order 9): 0,52.995 0,0 53.525,0 53.525,52.995
VDD-TARGET on Top Layer "VDD-TARGET_L01_P004" (solid, remove dead copper, pour order 4): 23.31,27.829 ccw(c23.31,27.779) 23.26,27.779 23.26,25.584 ccw(c23.31,25.584) 23.31,25.534 24.872,25.534 ccw(c24.872,25.589) 24.927,25.589 24.927,27.082 24.926,27.082 24.926,27.779 ccw(c24.876,27.779) 24.876,27.829 24.26,27.829
NetR11_2 on Top Layer "NETR11_2_L01_P000" (solid, pour order 0): 20.86,25.507 ccw(c20.91,25.507) 20.91,25.457 22.96,25.457 ccw(c22.96,25.507) 23.01,25.507 23.01,26.957 ccw(c22.96,26.957) 22.96,27.007 20.91,27.007 ccw(c20.91,26.957) 20.86,26.957
VDD-IN on Top Layer "VDD-IN_L01_P001" (solid, remove dead copper, pour order 1): 20.41,24.634 20.563,24.634 ccw(c20.563,24.682) 20.61,24.682 20.61,26.882 ccw(c20.563,26.882) 20.563,26.929 17.894,26.929 ccw(c17.894,26.694) 17.659,26.694 17.659,24.87 ccw(c17.898,24.87) 17.898,24.631
NetR10_2 on Top Layer "NETR10_2_L01_P006" (solid, remove dead copper, pour order 6): 12.67,39.015 cw(c12.751,39.015) 12.751,39.095 14.265,39.095 cw(c14.265,39.045) 14.315,39.045 14.315,37.125 cw(c14.25,37.125) 14.25,37.06 12.72,37.06 cw(c12.72,37.11) 12.67,37.11
VDD-EXT on Top Layer "VDD-EXT_L01_P007" (solid, remove dead copper, pour order 7): 11.903,40.808 11.903,39.395 ccw(c11.952,39.395) 11.953,39.345 14.148,39.345 ccw(c14.148,39.395) 14.198,39.395 14.198,40.838 ccw(c14.148,40.838) 14.148,40.888 11.982,40.888 ccw(c11.982,40.808)
VDD-TARGET on Top Layer "VDD-TARGET_L01_P008" (solid, remove dead copper, pour order 8): 12.72,36.81 14.915,36.81 cw(c14.915,36.76) 14.965,36.76 14.965,35.81 cw(c14.915,35.81) 14.915,35.76 12.72,35.76 cw(c12.72,35.81) 12.67,35.81 12.67,36.76 cw(c12.72,36.76)
GND on Bottom Layer "GND_L02_P010" (solid, remove dead copper, pour order 10): 0,52.995 53.525,52.995 53.525,0 0,0

## Keep-outs
Keep-Out Layer:
  lines w0.1: 50.25,52.995 cw(c50.25,49.745) 53.5,49.745 53.5,3.245 cw(c50.25,3.245) 50.25,-0.005 0,-0.005 0,52.995 50.25,52.995 ; 50.25,52.995 50.25,52.995

## Silkscreen, mask and mechanical layers (free items; w line width, h text height)
Top Overlay:
  circle w0.2: c5.005,47.995 r3.5
  circle w0.2: c5,5 r3.5
  region: 47.602,29.082 46.855,29.829 46.855,28.444
  lines w0.2: 28.705,1.811 cw(c28.705,2.311) 28.205,2.311 28.205,13.311 cw(c28.705,13.311) 28.705,13.811 29.505,13.811 cw(c29.505,13.311) 30.005,13.311 30.005,2.311 cw(c29.505,2.311) 29.505,1.811 28.705,1.811 ; 28.705,1.811 28.705,1.811
  lines w0.3: 19.483,31.514 46.373,31.514 46.373,34.595 46.373,35.524 53.034,35.524 ; 23.925,15.889 33.69,15.889 33.69,20.049 33.69,22.158 38.534,22.158 45.981,22.158 45.981,21.4 45.981,18.671 53.034,18.671
  text "+" at 8.887,50.912 h3
  text "-" at 12.706,50.522 h3
  text "SWD+SWO" at 26.342,48.783 h2
  text "VTG" at 21.808,45.768 h2
  text "1" at 30.651,45.768 h2
  text "2" at 44.772,45.144 h2
  text "1" at 30.44,45.061 h2
  text "SWDIO" at 20.225,43.195 h2
  text "2" at 30.65,43.195 h2
  text "5" at 33.978,42.587 h2
  text "4" at 44.772,41.972 h2
  text "4" at 30.651,40.688 h2
  text "SWDCLK" at 18.966,40.644 h2
  text "3" at 30.44,39.905 h2
  text "6" at 44.772,39.432 h2
  text "GND" at 18.966,38.118 h2
  text "5" at 30.586,38.078 h2
  text "SWO" at 21.375,35.608 h2
  text "6" at 30.647,35.608 h2
  text "RESET" at 20.158,33.068 h2
  text "3" at 30.651,33.068 h2
  text "Azek / Clark" at 15.527,25.628 h2.5 r90
  text "h" at 13.663,24.964 h10 r90
  text "JFLASH / SPI/QSPI" at 39.872,24.646 h2 r90
  text "EXT" at 16.26,22.158 h2
  text "VTG" at 22.728,21.67 h2
  text "5V" at 16.26,19.618 h2
  text "JFLASH" at 24.381,19.092 h2
  text "3.3V" at 16.26,17.078 h2
  text "1.8V" at 16.26,14.538 h2
  text "VT" at 13.777,9.48 h2
  text "TX" at 13.777,7.058 h2
  text "ARM 10 PIN JTAG" at 34.259,6.091 h2 r90
  text "'.ProjectDateShort' '.ProjectVersion'" at 29.494,4.811 h1.5 r90
  text "RX" at 13.777,4.548 h2
  text "REV:" at 29.505,2.311 h1.5 r90
  text "'.ProjectNumber'" at 27.375,2.2 h3 r90
  text "GND" at 13.777,1.859 h2
Bottom Overlay:
  region: 44.349,34.226 43.601,34.974 43.601,33.589
  text "GND  CS   DO/IO1  WP/IO2   GND / GND VDD RST/IO3   CLK     DI/IO0" at 48.246,36.175 h1.5 r90
Top Solder:
  drawing of 16 lines, arcs and shapes, not listed
Bottom Solder:
  drawing of 16 lines, arcs and shapes, not listed
Board Shape:
  the board outline again, w0.1